# Altium PCB ui_main.PcbDoc (part 3 of 3)
Units mil, origin at the board's own origin, x right, y up, seen from the top; angles counter-clockwise.
Board outline 7342.57 x 2614.56 mil, 2 copper layers (Top Layer, Bottom Layer); 207 components, 158 nets, 707 pads, 687 vias.
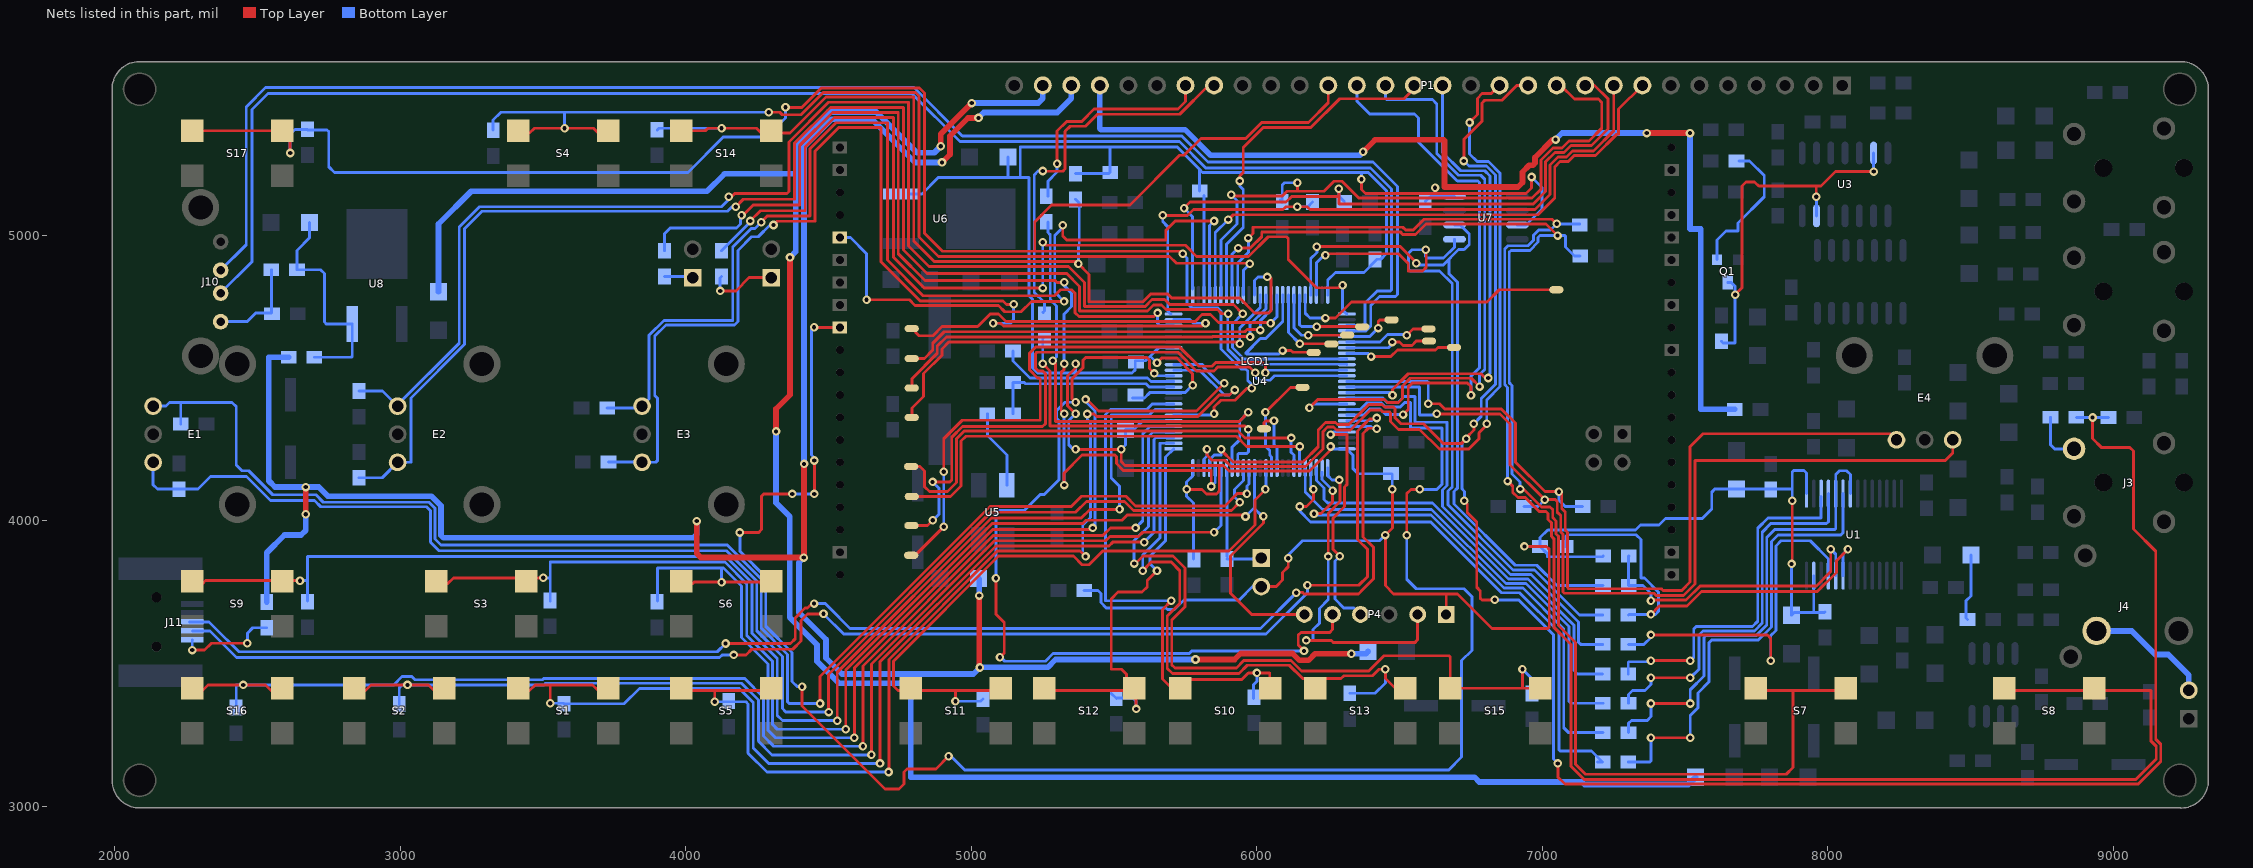
[diagram p2: the nets of this part, all layers, seen from the top]

## Via types
v1: diameter 30, hole 15, Top Layer to Bottom Layer, 687 vias

## Nets (pads, with @x,y where several pads share a name; then routed paths per layer and width w, separated by ;. In a path a pad name is that pad's centre, name@x,y a point inside that pad or via, vN(x,y) a via of type N, cw(c..) or ccw(c..) an arc to the next point about the centre after c; other vN are vias at no path point) (continued)
NetC98a_1: C98a.1 R43a.2 RFC4.1 U8.3 | length 801.8
  Bottom Layer w10: C98a.1@2682.14,5044.22 2682.14,4991.14 2638.14,4947.14 RFC4.1@2638.14,4879.22 2720.78,4879.22 2734,4866 2734,4696 2740.47,4689.53 U8.3@2831.39,4689.53 2831.39,4576.39 2827.78,4572.78 R43a.2@2698.86,4572.78
NetJ3_R: J3.R R1a.1 | length 184.9
  Bottom Layer w10: R1a.1@8779.86,4362.78 8779.86,4266.14 8794.03,4251.97 J3.R@8862.2,4251.97
NetJ4_B: J4.B P7.2 | length 440.1
  Bottom Layer w20: J4.B@8940.94,3614.17 9064.18,3614.17 9146.75,3531.61 9191.92,3531.61 9263.89,3459.64 P7.2@9263.89,3406.54
NetJ11_1: J11.1 R43b.2 | length 349.7
  Top Layer w10: v1(2271,3547) 2314,3547 2338,3571 v1(2464,3571)
  Bottom Layer w10: v1(2271,3547) 2271,3581.87 J11.1@2271.81,3582.68 ; v1(2464,3571) 2464,3606 2483.14,3625.14 R43b.2@2531.78,3625.14
NetLD1_1: LD1.1 R36.1 | length 100.2
  Bottom Layer w10: R36.1@3925.22,4855.86 4019.34,4855.86 LD1.1@4023.62,4851.57
NetLD2_1: LD2.1 R37.1 | length 253.6
  Top Layer w10: v1@4120,4800 4125,4805 4175,4805 4221.57,4851.57 LD2.1@4299.21,4851.57
  Bottom Layer w10: v1(4120,4805) 4120,4850.63 R37.1@4125.22,4855.86
NetP1_23: P1.23 R47.2 | length 1337.8
  Top Layer w10: v1(5250,5225) 5251,5224 5320,5224 5328,5232 5328,5364 5346,5382 5400,5382 5442,5424 5730,5424 5831,5525 P1.23@5850,5525
  Bottom Layer w10: v1(5250,5225) 5233.75,5225 5220,5211.25 5220,4800 5256,4764 5256,4734.63 R47.2@5250.22,4728.86
NetP1_24: P1.24 R48.2 | length 790.8
  Top Layer w10: v1(5300,5250) 5300,5364.63 5334,5398.63 5386.63,5398.63 5430,5442 5724,5442 5750,5468 P1.24@5750,5525
  Bottom Layer w10: R48.2@5268.22,5136.86 5268.22,5189.22 5300,5221 v1(5300,5250)
NetP6_1: P6.1 R40.2 U4.94 | length 432
  Bottom Layer w10: U4.94@5893.59,4184.85 5895.22,4183.22 R40.2@5895.22,3875 ; R40.2@5895.22,3865.86 6011.36,3865.86 P6.1@6015.11,3869.61
NetQ1_1: Q1.1 R13.1 | length 496.8
  Bottom Layer w10: Q1.1@7611.39,4914.66 7611.39,4983.39 7643,5015 7685.39,5015 7685.39,5043.39 7777,5135 7777,5209 7725.78,5260.22 R13.1@7689.14,5260.22
NetQ1_3: Q1.3 R15.1 U3.6 U3.13 | length 1335.5
  Top Layer w10: v1(7675,4792) 7699,4816 7699,5173 7713,5187 7743,5187 7758,5172 7959,5172 ; v1(7959,5135) 7959,5172 ; v1(8161,5223) 8027,5223 7976,5172 7959,5172
  Bottom Layer w10: R15.1@7627.22,4628.86 7633.08,4623 7675,4623 v1(7675,4792) 7675,4821.27 7661.61,4834.66 Q1.3@7649.39,4834.66 ; v1(7959,5135) 7960,5134 U3.13@7960,5068 ; U3.6@8160,5288 8160,5224 v1(8161,5223)
NetR6_2: R6.2 R21.1 U1.24 | length 1068.2
  Top Layer w10: v1(7380,3720) 7382,3722 7503,3722 7553,3772 7960,3772 8010,3822 v1(8010,3900)
  Bottom Layer w10: R6.2@7302.86,3876.78 7302.14,3876.07 R21.1@7302.14,3773.22 7351.78,3773.22 7380,3745 v1(7380,3720) ; v1(8010,3900) 8027.36,3882.64 U1.24@8027.36,3807.6
NetR7_2: R7.2 R22.1 U1.23 | length 1610.2
  Top Layer w10: v1(7380,3672) 7409,3701 7506,3701 7557,3752 7962.63,3752 8030,3819.37 8030,3860 v1(8070,3900)
  Bottom Layer w10: R7.2@7081.86,3909.78 7081.86,3944.86 7088,3951 7328,3951 7345,3934 7345,3800 7346,3799 7357.63,3799 7407,3749.63 7407,3683 7396,3672 v1(7380,3672) 7302.92,3672 R22.1@7301.14,3670.22 ; U1.23@8052.95,3807.6 8052.95,3882.95 v1(8070,3900)
NetR16_2: R16.2 U1.3 | length 1249
  Top Layer w10: v1(7380,3510) v1(7518,3510)
  Bottom Layer w10: R16.2@7300.86,3463.78 7300.86,3503.86 7303,3506 7376,3506 v1(7380,3510) ; v1(7518,3510) 7530,3522 7530,3621 7539,3630 7736,3630 7754,3648 7754,3974 7790,4010 7976.18,4010 U1.3@7976.18,4085
NetR17_2: R17.2 U1.4 | length 1350.2
  Top Layer w10: v1(7380,3450) v1(7518,3450)
  Bottom Layer w10: R17.2@7301.86,3360.78 7301.86,3391.86 7316,3406 7359,3406 7380,3427 v1(7380,3450) ; v1(7518,3450) 7548,3480 7548,3600 7562,3614 7742.63,3614 7770,3641.37 7770,3960 7800,3990 7995,3990 8001.77,3996.77 U1.4@8001.77,4095
NetR18_2: R18.2 U1.5 U1.7 | length 1672.9
  Top Layer w10: v1(7380,3360) v1(7518,3360)
  Bottom Layer w10: R18.2@7301.86,3257.78 7301.86,3290.86 7312,3301 7367,3301 7380,3314 v1(7380,3360) ; v1(7518,3360) 7518,3408 7566,3456 7566,3591 7573,3598 7749.25,3598 7786,3634.75 7786,3941 7815,3970 8025,3970 8027.36,3972.36 U1.5@8027.36,4095 8027.36,4162.36 8040,4175 8065,4175 8078.54,4161.46 U1.7@8078.54,4095
NetR19_2: R19.2 U1.6 | length 1600.8
  Top Layer w10: v1(7380,3240) v1(7518,3240)
  Bottom Layer w10: R19.2@7300.86,3154.78 7375.78,3154.78 7380,3159 v1(7380,3240) ; v1(7518,3240) 7518,3318 7545.29,3345.29 7545.29,3397.29 7584,3436 7584,3573 7593,3582 7755.88,3582 7802,3628.12 7802,3927 7825,3950 8045,3950 8052.95,3957.95 U1.6@8052.95,4095
NetR20_1: R20.1 U1.25 | length 1286.4
  Top Layer w10: v1(7380,3600) 7788,3600 7800,3588 v1(7800,3510)
  Bottom Layer w10: R20.1@7301.14,3567.22 7356.22,3567.22 7380,3591 v1(7380,3600) ; v1(7800,3510) 7800,3598 7818,3616 7818,3912 7836,3930 7938,3930 8001.77,3866.23 U1.25@8001.77,3807.6
NetR42_2: R42.2 U4.13 | length 627.8
  Bottom Layer w10: R42.2@5145.86,4594.78 5145.86,4559.14 5205,4500 5617,4500 5629,4488 U4.13@5708.55,4488
NetR43_2: R43.2 R44.2 U4.12 | length 679.5
  Bottom Layer w10: R44.2@5145.86,4374.78 R43.2@5145.86,4484.78 5185,4484.78 5189.78,4480 5611,4480 5622.68,4468.32 U4.12@5708.55,4468.32
NetR44_1: R44.1 U5.3 | length 278.6
  Bottom Layer w10: R44.1@5055.86,4374.78 5055.86,4299.14 5124.21,4230.79 U5.3@5124.21,4124.49
NRST: P4.5 U4.14 | length 2982.2
  Top Layer w10: v1(5086,3799) 5086,3672.37 5115,3643.37 5115,3537 v1(5100,3522) ; v1(5365,4415) 5353,4427 5353,4497.98 5391,4535.98 5391,4562.2 5400.8,4572 5615,4572 5624,4563 5624,4533 5640,4517 v1(5640,4516) ; v1@6172.77,3544 v1(6165,3544) 6165,3545 6145,3565 6145,3600 6154,3609 6255,3609 6264.57,3618.57 P4.5@6264.57,3672
  Bottom Layer w10: v1@5085.65,3807 5085.65,4027.65 5095,4037 5186,4037 5241,4092 5255.23,4092 5306.62,4143.38 5306.62,4350.38 5299,4358 5299,4385.77 5328.23,4415 v1(5365,4415) ; v1(5100,3522) 5103,3522 5117,3508 5259.3,3508 5286.3,3535 5763,3535 5772,3544 v1(6165,3544) v1@6166,3544 ; v1(5640,4516) 5648.31,4507.69 U4.14@5708.55,4507.69
PA0: C71.1 E3.A U4.23 | length 3482.8
  Top Layer w10: v1(4264,5046) 4285,5067 4435,5067 4435,5303 4526,5394 4706,5394 4706,4913 4831,4788 5291,4788 5312,4809 5351,4809 5363,4797 5363,4728.37 5376.37,4715 5639,4715 v1(5652,4728)
  Bottom Layer w10: C71.1@3724.14,4395.22 3840.1,4395.22 E3.A@3846.46,4401.57 3871,4426.12 3871,4649.63 3923.37,4702 4164,4702 4164,4959 4229,5024 4242,5024 v1(4264,5046) ; v1(5652,4728) 5652,4692 5659.15,4684.85 U4.23@5708.55,4684.85
PA1: C72.1 E3.B U4.24 | length 3997.5
  Top Layer w10: v1(4307,5036) 4320,5049 4452,5049 4452,5294 4536,5378 4684,5378 4684,4907 4821,4770 5110.51,4770 5122.51,4758 v1(5148,4758) ; v1(5076,4692) 5102,4692 5112,4682 5810,4682 v1(5820,4692)
  Bottom Layer w10: C72.1@3729.14,4205.22 3845.96,4205.22 E3.B@3846.46,4204.72 3894.72,4204.72 3900,4210 3900,4430 3891,4439 3891,4647 3930,4686 4170.63,4686 4182,4697.37 4182,4947 4230,4995 4253.3,4995 4294.3,5036 v1(4307,5036) ; v1@5075,4693 v1(5076,4692) 5136,4692 5148,4704 v1(5148,4758) ; U4.24@5708.55,4704.54 5765.46,4704.54 5778,4692 v1(5820,4692)
PA2: C1c.1 P1.9 U4.25 | length 2349.1
  Top Layer w10: v1(5670,5070) 5671,5069 5757,5069 5778,5090 6092,5090 6102,5100 v1(6141,5100) 6176,5100 6186,5090 6974,5090 7027,5143 7027,5246 7055,5274 7084,5274 7105,5295 7179,5295 7250,5366 P1.9@7250,5525
  Bottom Layer w10: v1(5670,5070) 5670,5047.93 5688,5029.93 5688,4734.77 U4.25@5698.55,4724.22 ; v1(6141,5100) 6178.63,5100 C1c.1@6194.78,5116.14
PA3: C1b.1 P1.10 U4.26 | length 2277.8
  Top Layer w10: v1(5745,5095) 5766,5116 6102,5116 6122,5136 6286,5136 6287,5135 ; v1(6287,5163) 6287,5135 ; P1.10@7150,5525 7183,5525 7230,5478 7230,5372 7172,5314 7099.63,5314 7075.63,5290 7043.63,5290 7011,5257.37 7011,5153 6968,5110 6288,5110 6287,5111 6287,5135
  Bottom Layer w10: v1(5745,5095) 5775,5065 U4.26@5775,4811.63 ; v1(6287,5163) 6287,5137.63 C1b.1@6305.86,5118.78
PA4: LCD1.36 U4.29 | length 2181.2
  Top Layer w10: v1(4633,4774) 4783,4774 4803,4754 5095,4754 5117,4732 5174,4732 5210.3,4768.3 v1(5324.71,4768.3) ; v1(5320,5035) 5320,4997 5334,4983 5681,4983 5681,5017 5714,5050 v1(5850,5050)
  Bottom Layer w10: LCD1.36@4539.37,4992.13 4576.22,4992.13 4633,4935.35 v1(4633,4774) ; v1(5320,5035) 5320,5027 5292,4999 5292,4801 v1(5324.71,4768.3) ; U4.29@5834.54,4791.15 5834.54,5034.54 v1(5850,5050)
PA5: P1.8 U4.30 | length 2043.1
  Top Layer w10: v1(5900,5055) 5917,5072 6985,5072 7043,5130 7043,5239.37 7061.63,5258 7090.63,5258 7111.63,5279 7185.63,5279 7260.63,5354 7267,5354 7267,5442 P1.8@7350,5525
  Bottom Layer w10: U4.30@5854.22,4791.15 5854.22,5009.22 v1(5900,5055)
PA6: C1a.1 P1.11 U4.31 | length 2318
  Top Layer w10: v1(5910,5142) 5914,5138 6089,5138 6105,5154 6142,5154 ; v1(6142,5184) 6142,5154 ; P1.11@7050,5525 7064,5525 7112,5477 7196,5477 7208,5465 7208,5375 7163,5330 7093,5330 7069,5306 7037,5306 6995,5264 6995,5161.23 6963.77,5130 6356.77,5130 6297.77,5189 6270,5189 6235,5154 6142,5154
  Bottom Layer w10: U4.31@5873.91,4791.15 5873.91,4983.91 5930,5040 5930,5122 v1(5910,5142) ; C1a.1@6082,5122.92 C1a.1@6088.78,5116.14 6088.78,5175.78 6097,5184 v1(6142,5184)
PA7: P1.16 U4.32 | length 1245.3
  Top Layer w10: v1(5940,5190) 5940,5208 5952,5220 5952,5307 6023,5378 6190,5378 6290,5478 6515,5478 6550,5513 P1.16@6550,5525
  Bottom Layer w10: U4.32@5893.59,4791.15 5893.59,4968.59 5952,5027 5952,5160 5940,5172 v1(5940,5190)
PA8: P1.17 U4.67 | length 2167.8
  Top Layer w10: v1(6184,4396) 6213,4425 6447,4425 6458,4414 6496,4414 6510,4428 6510,4471.75 6537.25,4499 6751,4499 v1(6780,4470)
  Bottom Layer w10: v1(6184,4396) 6197.26,4409.26 U4.67@6314.85,4409.26 ; P1.17@6450,5525 6450,5480 6455,5475 6615,5475 6630,5460 6630,5286 6706,5210 6784,5210 6798,5196 6798,4530 6780,4512 v1(6780,4470)
PA9: LCD1.32 U4.68 | length 6225.5
  Top Layer w10: v1(4189,3959) 4255,3959 4265,3969 4265,4086 4273,4094 v1(4373,4094) ; v1(4407,3419) 4407,3351 4697,3061 4747,3061 4764,3078 4764,3120.11 4774.89,3131 4876,3131 v1(4920,3175) ; v1(4449,4678) 4449.83,4677.17 LCD1.32@4539.37,4677.17 ; v1(4450,4094) v1(4450,4211) ; v1(6525,3949) 6525,4095 6540,4110 v1(6570,4110)
  Bottom Layer w10: v1(4189,3959) 4189,3893.37 4280,3802.37 4280,3630.63 4372,3538.63 4372,3437 4390,3419 v1(4407,3419) ; v1(4373,4094) v1(4450,4094) ; v1(4449,4678) 4440,4669 4440,4230 4450,4220 v1(4450,4211) ; v1(4920,3175) 4929,3175 4977,3127 6672,3127 6717,3172 6717,3510 6753,3546 6753,3734 6725,3762 6558,3762 6525,3795 v1(6525,3949) ; U4.68@6314.85,4389.58 6361.58,4389.58 6385.19,4413.19 6434.81,4413.19 6450,4398 6502,4398 6518,4414 6538,4414 6538,4325 6648,4325 6648,4128 6630,4110 v1(6570,4110)
PA10: P1.18 U4.69 | length 1989.4
  Top Layer w10: v1(6512,4372) 6530,4390 6530,4469.12 6543.88,4483 6737,4483 6750,4470 v1(6750,4440)
  Bottom Layer w10: U4.69@6314.85,4369.89 6373.89,4369.89 6395.37,4391.37 6431.63,4391.37 6451,4372 v1(6512,4372) ; P1.18@6350,5525 6350,5470 6395.14,5424.86 6552,5424.86 6566.22,5410.63 6566.22,5325.78 6702,5190 6774,5190 6780,5184 6780,4536 6750,4506 v1(6750,4440)
PA13: P4.4 U4.72 | length 843.2
  Top Layer w10: v1(6258,4302) 6315,4302 6315,4126.23 6307,4118.23 6307,4050 6266,4009 6266,3900 v1(6290,3876)
  Bottom Layer w10: v1(6258,4302) 6266.84,4310.84 U4.72@6314.85,4310.84 ; v1(6290,3876) 6273,3859 6273,3726 6304,3695 6340,3695 P4.4@6363,3672
PA14: P4.2 U4.76 | length 1185.4
  Top Layer w10: v1(6173,3581) 6261,3581 6269,3573 6553,3573 6563,3583 P4.2@6563,3672 ; v1(6250,3875) 6250,4026 6291,4067 6291,4140 v1(6288,4143)
  Bottom Layer w10: v1(6173,3581) 6196,3581 6197,3582 6197,3619 6219,3641 6219,3693 6250,3724 v1(6250,3875) ; U4.76@6247.92,4184.85 6247.92,4157.59 6262.51,4143 v1(6288,4143)
PA15: R18.1 U4.77 | length 1734.1
  Top Layer w10: v1(6200,4025) 6225,4025 6265,4065 v1(6265,4105)
  Bottom Layer w10: v1(6200,4025) 6205,4020 6609.37,4020 6865.37,3764 6932,3764 7075,3621 7075,3275 7092.22,3257.78 R18.1@7211.86,3257.78 ; U4.77@6228.24,4170 6228.24,4144.39 6265,4107.63 v1(6265,4105)
PB0: C53.2 S4.2 U4.35 | length 3697.7
  Top Layer w10: 3452.76,5358.27 3469.49,5375 v1(3575,5375) 3676.18,5375 S4.2@3692.91,5358.27 ; v1(4290,5431) 4328.65,5431 4337.65,5422 4403.37,5422 4481.37,5500 4804.63,5500 4817,5487.63 4817,4994 4885,4926 5694,4926 5718,4902 5973,4902 v1(5975,4900)
  Bottom Layer w10: C53.2@3324.78,5369.14 3324.78,5403.22 3352.56,5431 3575,5431 ; v1(3575,5375) 3575,5431 ; v1(4290,5431) 3575,5431 ; U4.35@5952.65,4791.15 5952.65,4877.65 v1(5975,4900)
PB2: C63.2 R38.2 S14.2 U4.37 | length 3502.6
  Top Layer w10: S14.2@3984.25,5366.14 4068.14,5366.14 4077,5375 v1(4125,5375) 4247.05,5375 4263.78,5358.27 4365.27,5358.27 4491,5484 4798,5484 4798,4980 4870,4908 5367,4908 v1(5375,4900) 5412,4863 5412,4767 5601,4767 5628,4794 5688,4794 5702,4780 5940,4780 5992,4728 6042,4728 6050,4736 v1@6050,4850
  Bottom Layer w10: C63.2@3899.78,5369.14 3905.63,5375 v1(4125,5375) ; R38.2@5365.22,5125.86 5378,5113.08 5378,4968 5375,4965 v1(5375,4900) ; U4.37@5992.02,4791.15 5992.02,4842.02 6004,4854 v1@6046,4854
  other v1: 6036,4854
PB3: C52.2 P4.6 S3.2 U4.89 | length 4682.3
  Top Layer w10: S3.2@3165.35,3779.53 3185.83,3800 v1(3500,3800) ; v1(4560,3270) 4560,3476.76 5073.24,3990 5390,3990 5402,4002 5528,4002 5546,4020 5955,4020 v1(5960,4015) ; v1(6023,4016) 6023,3992 5908,3877 5908,3746 5982,3672 P4.6@6166.15,3672
  Bottom Layer w10: v1(3500,3800) 3525,3800 ; C52.2@3525,3719.14 3525,3800 ; v1(4560,3270) 4320,3270 4304,3286 4304,3507 4213,3598 4213,3778.86 4136.86,3855 3525,3855 3525,3800 ; v1(5960,4015) 5990,4045 6019,4016 v1(6023,4016) ; 5992.02,4047.02 U4.89@5992.02,4184.85
PB4: C67.1 E1.A U4.90 | length 5210.6
  Top Layer w10: v1(4470,3360) 4470,3454.65 5065.35,4050 5350,4050 5386,4086 5541,4086 5575,4052 5888,4052 5931,4095 v1(5965,4095)
  Bottom Layer w10: E1.A@2133.86,4401.57 2178.57,4401.57 2191.14,4414.14 2230,4414.14 ; C67.1@2230.63,4338.92 2230.63,4413.51 2230,4414.14 ; v1(4470,3360) 4362,3360 4356,3366 4356,3532 4264,3624 4264,3795.75 4144.75,3915 3142,3915 3121,3936 3121,4044 3100,4065 2730,4065 2704,4091 2553,4091 2469,4175 2445,4175 2425,4195 2425,4400 2410.86,4414.14 2230,4414.14 ; v1(5965,4095) 5965,4122 5972.33,4129.33 U4.90@5972.33,4184.85
PB5: C68.1 E1.B U4.91 | length 5073
  Top Layer w10: v1(4500,3330) 4500,3462.02 5067.98,4030 5365,4030 5403,4068 5536.37,4068 5568.37,4036 5911,4036 v1(5940,4065)
  Bottom Layer w10: E1.B@2133.86,4204.72 2133.86,4126.14 2149.14,4110.86 C68.1@2225.22,4110.86 2290.86,4110.86 2335,4155 2461,4155 2545,4071 2699,4071 2721,4049 3091,4049 3105,4035 3105,3925 3135,3895 4142.12,3895 4248,3789.12 4248,3615 4338,3525 4338,3342 4350,3330 v1(4500,3330) ; v1(5940,4065) 5922,4083 5922,4110 5952.65,4140.65 U4.91@5952.65,4184.85
PB6: R47.1 U4.92 | length 1169.1
  Top Layer w10: v1(5250,4550) 5275,4525 5275,4332 5958,4332 v1(5970,4320)
  Bottom Layer w10: v1(5250,4550) 5250,4638.63 R47.1@5250.22,4638.86 ; U4.92@5932.96,4200 5932.96,4232.04 5935.92,4235 5964,4235 5970,4241 v1(5970,4320)
PB7: R48.1 U4.93 | length 1627.6
  Top Layer w10: v1(5285,4560) 5295,4550 5295,4348 5938,4348 v1(5970,4380)
  Bottom Layer w10: R48.1@5268.22,5046.86 5268.22,5009.78 5276,5002 5276,4774 5298,4752 5298,4573 v1(5285,4560) ; U4.93@5913.28,4184.85 5913.28,4257.28 5940,4284 5940,4350 v1(5970,4380)
PB8: C51.2 S2.2 U4.95 | length 4107
  Top Layer w10: 2877.95,3405.51 2897.44,3425 v1(3025,3425) 3098.62,3425 S2.2@3118.11,3405.51 ; v1(4650,3180) 4650,3498.88 5081.12,3930 5470,3930 5485,3945 5585,3945 5600,3960 v1(5850,3960)
  Bottom Layer w10: C51.2@2996.22,3357.86 2996.22,3415.22 3006,3425 v1(3025,3425) 3503,3425 3509,3431 4195,3431 4254,3372 4254,3228 4302,3180 v1(4650,3180) ; v1(5850,3960) 5873.99,3983.99 5873.99,4002 U4.95@5873.91,4184.85
PB9: R36.2 U4.96 | length 3786.1
  Top Layer w10: v1@4200,5070 4236,5106 4399,5106 4399,5315 4514,5430 4744,5430 4744,4935 4838,4841 5294,4841 5300,4835 v1(5325,4835) ; v1(5325,4125) 5325,4167 5388,4230 5502,4230 5508,4224 5508,4200 5532,4176 5840,4176 v1(5840,4120) ; v1(5325,4375) 5315,4385 5315,4520 5325,4530 v1(5325,4550)
  Bottom Layer w10: R36.2@3925.22,4945.86 3925.22,5005.22 3945,5025 4176.74,5025 4191.74,5040 v1@4191.74,5066.74 ; v1(5325,4125) v1(5325,4375) ; v1(5325,4550) 5325,4724 5351,4750 5351,4797 5325,4823 v1(5325,4835) ; v1(5840,4120) 5854.22,4134.22 U4.96@5854.22,4184.85
  other v1: 4195,5070
PB10: R21.2 U4.47 U7.6 | length 2385
  Top Layer w10: v1(6210,4960) 6503,4960 6558,4905 v1(6558,4902)
  Bottom Layer w10: U4.47@6188.87,4791.15 6188.87,4918.87 6210,4940 v1(6210,4960) ; v1@6558,4900 6562,4896 6652.63,4896 6706.63,4950 6726,4950 6744,4968 6744,5004 6712,5036 U7.6@6692,5036 ; 6673,4916.37 6673,4865 6702,4836 6702,4114.12 6690,4102.12 6690,4059 6905,3844 6980,3844 7050.78,3773.22 R21.2@7212.14,3773.22
PB11: R22.2 U4.48 U7.5 | length 2559.6
  Top Layer w10: v1(6240,4930) 6240,4935 6496,4935 6530,4901 6530,4875 6580,4875 6593,4888 6593,4947 v1(6591,4949)
  Bottom Layer w10: U4.48@6208.55,4791.15 6208.55,4903.55 v1@6232.5,4927.5 ; U7.5@6692,4986 6692,4958 6654,4920 6597,4920 6591,4926 v1(6591,4949) 6543,4949 6531,4937 6531,4881 6537,4875 6640,4875 6684,4831 6684,4118.75 6669,4103.75 6669,4056 6897,3828 6972,3828 7129.78,3670.22 R22.2@7211.14,3670.22
PB12: R37.2 U4.51 | length 3467
  Top Layer w10: v1(4225,5050) 4261,5086 4418,5086 4418,5309 4521,5412 4727,5412 4727,4923 4835,4815 v1(5250,4815) ; v1(5250,4975) 5260,4965 5750,4965 5789,4926 5970.63,4926 6039.63,4995 6104,4995 6110,4989 6110,4915 6143,4882 6143.25,4882 6209.25,4816 6286.15,4816 v1@6295.15,4825
  Bottom Layer w10: R37.2@4125.22,4945.86 4225,5045.63 v1(4225,5050) ; v1(5250,4815) v1(5250,4975) ; v1(6300,4825) 6300,4739.07 U4.51@6314.85,4724.22
PC0: C54.2 S5.2 U4.15 | length 3684
  Top Layer w10: S5.2@4011.81,3405.51 4102,3405.51 ; v1(4101,3366) 4101,3404.51 4102,3405.51 ; S5.2@4271.65,3405.51 4102,3405.51 ; v1(4710,3120) 4711,3121 4711,3514.63 5090.37,3894 5381,3894 v1@5390,3885 ; v1(5406,4374) 5430,4374 5439,4365 5793,4365 5868,4440 5904,4440 v1(5922,4458)
  Bottom Layer w10: v1(4101,3366) 4210,3366 4218,3358 4218,3186 4284,3120 v1(4710,3120) ; v1(5400,3875) 5390,3885 5390,3985 5417,4012 5417,4343 5406,4354 5406,4369 v1@5400,4375 ; U4.15@5708.55,4527.37 5798.63,4527.37 5886,4440 5904,4440 v1(5922,4458)
PC1: C55.2 S6.2 U4.16 | length 4089
  Top Layer w10: 4023.62,3779.53 4029.09,3785 v1(4125,3785) 4258.31,3785 S6.2@4263.78,3779.53 ; v1(4590,3240) 4590,3484.14 5075.86,3970 5420,3970 v1(5425,3975) ; v1(5400,4425) 5405,4425 5445,4385 5789,4385 v1(5886,4482)
  Bottom Layer w10: C55.2@3900,3719.14 3900,3835 4125,3835 ; v1(4125,3785) 4125,3835 ; v1(4590,3240) 4314,3240 4288,3266 4288,3498 4195,3591 4195,3772 4132,3835 4125,3835 ; v1(5400,4425) 5400,4418 5433,4385 5433,3983 v1(5425,3975) ; U4.16@5708.55,4547.06 5808.94,4547.06 5812,4544 5812,4538 5868,4482 v1(5886,4482)
PC4: C56.2 S7.2 U4.33 | length 4910.5
  Top Layer w10: v1(5935,4955) 5977,4955 6017,4995 6017,5010 6019,5012 6502,5012 6511,5003 6556,5003 6592,5039 7013,5039 v1(7053,4999) ; v1(6922,4111) 6934.23,4111 6997.23,4048 7027,4048 7036,4039 7036,4011.37 7048,3999.37 7048,3954 7056,3946 7056,3633.63 7116,3573.63 7116,3147 7151,3112 7854,3112 7878,3136 7878,3405.51 ; 7787.4,3405.51 7878,3405.51 ; S7.2@8035.43,3405.51 7878,3405.51
  Bottom Layer w10: U4.33@5913.28,4791.15 5913.28,4933.28 v1(5935,4955) ; v1(6922,4111) 6922,4136 6894,4164 6894,4473.63 6884,4483.63 6884,4941 6890,4947 6956.15,4947 6985,4975.85 6985,4992 6992,4999 v1(7053,4999) 7078.49,4999 7081,4996.49 7081,4959 7112.78,4927.22 C56.2@7132.14,4927.22
PC5: C57.2 S8.2 U4.34 | length 6420.8
  Top Layer w10: v1(5970,4990) 5986.5,5006.5 5986.5,5028.08 6510.92,5028.08 6520,5019 6548,5019 6585,5056 7034,5056 v1(7050,5040) ; v1(6878,4139) 6896,4121 6896,4099 6914,4081 6940,4081 6989,4032 7013,4032 7020,4025 7020,4004.75 7031.5,3993.25 7031.5,3945.5 7040,3937 7040,3627 7100,3567 7100,3140.37 7146.37,3094 9078,3094 9150,3166 9150,3210.37 9131,3229.37 9131,3405.51 S8.2@8905.51,3405.51 ; S8.2@8645.67,3405.51 8645.67,3404.14 8656.11,3404.14 8657.48,3405.51 S8.2@8897.64,3405.51
  Bottom Layer w10: U4.34@5932.96,4791.15 5932.96,4902.96 5970,4940 v1(5970,4990) ; v1(6878,4139) 6878,4467 6868,4477 6868,4952 6879,4963 6949.53,4963 6969,4982.47 6969,5000 6987,5018 7028,5018 v1(7050,5040) C57.2@7131,5040
PC6: C73.1 E4.A U4.63 | length 3172.1
  Top Layer w10: v1@6600,4400 6610,4410 6640,4410 6658,4392 6856,4392 6906,4342 6906,4205 7009,4102 v1(7058,4102) 7068,4092 7068,4043 7080,4031 7080,3967.25 7088,3959.25 7088,3766 7092,3762 7416,3762 7422,3756 7488,3756 7517,3785 7517,4259 7563,4305 8218.62,4305 E4.A@8240.16,4283.46
  Bottom Layer w10: U4.63@6314.85,4488 6597,4488 6600,4485 v1(6600,4410) ; v1(7058,4102) 7058,4072 7080.22,4049.78 C73.1@7140.86,4049.78
PC7: C74.1 E4.B U4.64 | length 3332.7
  Top Layer w10: v1(6630,4375) 6631,4374 6851.37,4374 6887,4338.37 6887,4195 v1(7008,4074) 7045,4074 7052,4067 7052,4030 7064,4018 7064,3960.63 7072,3952.63 7072,3751 7077,3746 7390.77,3746 7398.77,3738 7494,3738 7535,3779 7535,4211 8411,4211 8437.01,4237.01 E4.B@8437.01,4283.46
  Bottom Layer w10: U4.64@6314.85,4468.32 6570,4468.32 6570,4370 6625,4370 v1(6630,4375) ; C74.1@6935.14,4050.22 6984.22,4050.22 v1(7008,4074)
PC8: P1.15 U4.65 | length 1687.4
  Top Layer w10: v1(6475,4440) 6475,4460.12 6529.88,4515 6785,4515 v1@6800,4500
  Bottom Layer w10: U4.65@6314.85,4448.63 6466.37,4448.63 v1(6475,4440) ; P1.15@6650,5525 6650,5290 6714,5226 6798,5226 6816,5208 6816,4516 v1@6800,4500
  other v1: 6810,4500
PC9: R20.2 U4.66 | length 1560.3
  Bottom Layer w10: U4.66@6314.85,4428.95 6315.9,4430 6440.63,4430 6456.63,4414 6494,4414 6515,4435 6554,4435 6554,4346 6555,4345 6666,4345 6666,4123.37 6650,4107.37 6650,4050 6888,3812 6960,3812 7127,3645 7127,3574.63 7134.41,3567.22 R20.2@7211.14,3567.22
PC10: R16.1 U4.78 | length 1442.4
  Bottom Layer w10: U4.78@6208.55,4184.85 6208.55,4141.45 6235,4115 6235,4075 6248,4062 6615,4062 6881,3796 6949,3796 7111,3634 7111,3476 7123.22,3463.78 R16.1@7210.86,3463.78
PC11: R19.1 U4.79 | length 1865
  Top Layer w10: v1(6150,4050) 6174,4050 6198,4074 v1@6198,4115 ; v1@6198,4113 v1@6200,4115
  Bottom Layer w10: v1@6150,4049 6150,4034 6188,3996 6609,3996 6857,3748 6920,3748 7058,3610 7058,3198 7062,3194 7171.63,3194 R19.1@7210.86,3154.78 R19.1@7192.78,3154.78 ; v1@6188.87,4121.13 U4.79@6188.87,4184.85
  other v1: 6198,4110
PC12: R17.1 U4.80 | length 1586.4
  Bottom Layer w10: U4.80@6169.18,4184.85 6169.18,4100.82 6230,4040 6612,4040 6872,3780 6942.37,3780 7093,3629.37 7093,3368 7100.22,3360.78 R17.1@7211.86,3360.78
PC13: C66.2 P1.19 S17.2 U4.7 | length 6769.3
  Top Layer w10: S17.2@2271.65,5366.14 S17.2@2586.61,5366.14 ; S17.2@2559.06,5358.27 2608.73,5358.27 2614,5353 v1(2614,5288) ; v1(4349,5448) 4406,5448 4474,5516 4818,5516 4836,5498 4836,5007 4899,4944 5731,4944 v1(5740,4935) ; 5222,4944 5222,5047 5281,5106 5555,5106 5729,5280 5745,5280 5804,5339 5961,5339 6017,5395 6181,5395 6250,5464 P1.19@6250,5525 ; v1(5850,4375) 5850,4398 5874,4422 5922.77,4422 5964.77,4464 v1(5982,4464)
  Bottom Layer w10: v1(2614,5288) 2614,5354 2630.86,5370.86 C66.2@2673.07,5370.86 ; C66.2@2675.22,5370.86 C66.2@2673.07,5370.86 ; v1(4349,5448) 4349,5411 4282,5344 4131,5344 4007,5220 2769,5220 2749,5240 2749,5363 2742.86,5369.14 2674.78,5369.14 C66.2@2673.07,5370.86 ; U4.7@5708.55,4369.89 5844.89,4369.89 v1(5850,4375) ; v1(5740,4935) 5755,4920 5755,4763 5772,4746 5862,4746 5874,4734 5874,4602 5944,4532 5960,4532 5968,4524 5968,4491.8 5982,4477.8 v1(5982,4464)
PC14: C58.2 S9.2 U4.8 | length 4805.8
  Top Layer w10: S9.2@2307.09,3779.53 2317.8,3790.25 v1(2648.55,3790.25) ; v1(4530,3300) 4530,3469.39 5070.61,4010 5385,4010 5415,4040 v1(5519,4040)
  Bottom Layer w10: v1(2648.55,3790.25) 2674.75,3790.25 2675,3790 ; C58.2@2675,3719.14 2675,3790 ; v1(4530,3300) 4338,3300 4320,3318 4320,3518 4231,3607 4231,3783.49 4139.49,3875 2675,3875 2675,3790 ; v1(5519,4040) 5519,4121 5490,4150 5490,4370 5623,4370 5643,4390 5708.13,4390 U4.8@5708.55,4389.58
PC15: C59.2 S10.2 U4.9 | length 2007.3
  Top Layer w10: v1(5700,3720) 5669,3689 5669,3446 5720.94,3394.06 5762.59,3444 5947,3444 5970,3467 v1(6000,3467) 6044,3467 6044.86,3466.14 6044.86,3411 S10.2@6047.24,3413.39
  Bottom Layer w10: v1(5700,3720) 5470,3720 5470,4372.63 5487.37,4390 5614,4390 5633.26,4409.26 U4.9@5708.55,4409.26 ; C59.2@5987.78,3377.14 5987.78,3425.78 6000,3438 v1(6000,3467)
PD0: L25.1 U4.81 | length 1631.7
  Top Layer w10: L25.1@4792.08,4085 4927,4085 4964,4122 4964,4279 4981,4296 5928,4296 5964,4260 6140,4260 6150,4250 v1(6150,4260)
  Bottom Layer w10: U4.81@6149.5,4184.85 6149.5,4249.5 v1@6150,4250
PD1: L26.1 U4.82 | length 1683.5
  Top Layer w10: L26.1@4789.86,4190.22 4819.78,4190.22 4836,4174 4836,4119 4853,4102 4916,4102 4948,4134 4948,4287 4975,4314 5934,4314 5958,4290 v1@6108,4290
  Bottom Layer w10: v1(6120,4290) 6120,4240 6129.81,4230.19 U4.82@6129.81,4184.85
PD4: L14.1 U4.85 | length 230.5
  Top Layer w10: L14.1@6024.86,4322.22 6024.86,4344.14 6030.71,4350 v1(6060,4350) v1@6059,4351
  Bottom Layer w10: v1(6060,4350) 6060,4266 6070.76,4255.24 U4.85@6070.76,4184.85
PD5: L13.1 U4.86 | length 369.9
  Top Layer w10: v1(6030,4380) 6117.22,4467.22 L13.1@6159.86,4467.22
  Bottom Layer w10: v1(6030,4380) 6030,4261 6044.95,4246.05 6044.95,4230 6051.07,4223.88 U4.86@6051.07,4184.85
PD6: C60.2 S11.2 U4.87 | length 2282.6
  Top Layer w10: v1(4944,3368) 4944,3405.51 ; S11.2@5074.8,3405.51 4944,3405.51 ; v1(6030,4110) 5993,4073 5993,3984.63 5902.37,3894 5460,3894 5412,3846 5388,3846 5358,3876 5095,3876 4727,3508 4727,3421.02 4742.51,3405.51 4944,3405.51
  Bottom Layer w10: v1(4944,3368) 5032.37,3368 C60.2@5040.22,3375.86 ; v1(6030,4110) 6031.39,4111.39 U4.87@6031.39,4184.85
PD8: L8.1 U4.55 | length 193.5
  Top Layer w10: v1@6425,4676 6425,4697.91 6430.86,4703.77 L8.1@6471.78,4703.77
  Bottom Layer w10: U4.55@6314.85,4645.48 6395.48,4645.48 v1(6425,4675)
PD9: L9.1 U4.56 | length 306.8
  Top Layer w10: v1(6525,4650) 6547.04,4672.04 L9.1@6600.86,4672.04
  Bottom Layer w10: U4.56@6314.85,4625.8 6430.8,4625.8 6457,4652 6523,4652 v1(6525,4650)
PD10: L10.1 U4.57 | length 312.4
  Top Layer w10: v1(6474,4626) 6500.02,4626 6512,4614.02 6543.02,4614.02 6558.22,4629.22 L10.1@6602.86,4629.22
  Bottom Layer w10: U4.57@6314.85,4606.11 6461.11,4606.11 6475,4620 6474,4621 v1(6474,4626)
PD11: L12.1 U4.58 | length 394
  Top Layer w10: v1(6400,4575) 6469,4575 6492,4598 6625,4598 6634.22,4607.22 L12.1@6690.48,4607.22 ; L12.1@6689.63,4607 L12.1@6689.85,4606.78
  Bottom Layer w10: U4.58@6314.85,4586.43 6388.57,4586.43 v1(6400,4575)
PD12: C69.1 E2.A U4.59 | length 5121.9
  Top Layer w10: v1@4150,5125 4171,5146 4354,5146 4361,5153 4361,5327 4500,5466 4780,5466 4780,4962 4852,4890 5340,4890 5396,4834 5396,4751 5609,4751 5633,4775 5677,4775 5694.5,4757.5 5917.5,4757.5 v1(5950,4725)
  Bottom Layer w10: C69.1@2854.78,4454.14 2937.59,4454.14 E2.A@2990.16,4401.57 2990.16,4406.16 3206,4622 3206,5029 3277,5100 4125,5100 v1@4150,5125 ; v1(5950,4725) 5914,4689 5914,4607.25 5954.51,4566.74 U4.59@6314.85,4566.74
  other v1: 4150,5135
PD13: C70.1 E2.B U4.60 | length 5290.3
  Top Layer w10: v1(4175,5100) 4201,5126 4381,5126 4381,5322 4507,5448 4762,5448 4762,4948 4844,4866 5334,4866 5379,4821 5379,4735 5617,4735 5638,4756 5666,4756 5681.5,4740.5 5861.5,4740.5 5877,4725 v1(5900,4725)
  Bottom Layer w10: C70.1@2855.22,4150.86 2936.29,4150.86 E2.B@2990.16,4204.72 3036.72,4204.72 3037,4205 3037,4430.37 3225,4618.37 3225,5023 3286,5084 4145.77,5084 4161.77,5100 v1(4175,5100) ; v1(5900,4725) 5898,4723 5898,4600.63 5950.63,4548 6313.91,4548 U4.60@6314.85,4547.06
PD14: L23.1 U4.61 | length 2268.4
  Top Layer w10: L23.1@4789.86,3879.22 4803.22,3879.22 v1(4903,3979) ; v1(4903,4172) 4903,4287.25 4967.75,4352 5241,4352 5241,4496 5236.78,4500.22 5231.78,4500.22 5203,4529 5203,4586.63 5224.37,4608 5730,4608 5797,4541 5843,4541 5856,4554 6019.49,4554 6030,4543.49 v1(6030,4518)
  Bottom Layer w10: v1(4903,3979) v1(4903,4172) ; v1(6030,4518) 6039.37,4527.37 U4.61@6314.85,4527.37
PD15: L24.1 U4.62 | length 2227.5
  Top Layer w10: L24.1@4790.86,3983.44 4846.44,3983.44 v1(4865,4002) ; v1(4864,4136) 4924,4136 4931,4143 4931,4292.63 4968.37,4330 5249,4330 5259,4340 5259,4515 5250,4524 5234,4524 5224,4534 5224,4585 5229,4590 5724,4590 5789,4525 5849.63,4525 5862.63,4538 5974,4538 v1(5994,4518)
  Bottom Layer w10: v1(4864,4136) 4886,4114 4886,4023 v1(4865,4002) ; v1(5994,4518) 5994,4506 6008,4492 6046,4492 6061.69,4507.69 U4.62@6314.85,4507.69
PE0: C37.1 P1.12 R1a.2 U4.97 | length 7730
  Top Layer w10: v1(5875,4250) 5875,4247 5916,4206 6162,4206 6215,4259 6215,4319 6215.6,4319 6240.6,4344 6275.4,4344 6282.4,4337 6322,4337 6392,4407 6438,4407 6447,4398 6479,4398 6484,4393 6484,4361 6505,4340 6583,4340 6653,4270 6716,4270 v1(6733,4287) 6733,4290.63 6760,4317.63 v1(6760,4340) ; v1(6725,5260) 6725,5336 6788.39,5399.39 6788.39,5463.39 6798,5473 6858.1,5473 6910.1,5525 P1.12@6950,5525 ; v1(6726,4070) 6737,4059 6737,4029 6770,3996 6770,3767 6782.5,3754.5 6782.5,3728.5 6788,3723 v1(6833,3723) ; v1(7054,3150) 7054,3103 7079,3078 9087,3078 9166,3157 9166,3217 9148,3235 9148,3893 9070,3971 9070,4244 9058,4256 8959,4256 8926.86,4288.14 v1(8926.86,4361.78)
  Bottom Layer w10: U4.97@5834.54,4184.85 5834.54,4213.71 5850.83,4230 5875,4230 v1(5875,4250) ; v1(6725,5260) 6743,5242 6804.63,5242 6836,5210.63 6836,4478 6786,4428 6786,4366 v1(6760,4340) ; v1(6726,4070) 6727,4071 6727,4103 6718,4112 6718,4272 v1(6733,4287) ; v1(6833,3723) 6917,3723 7039,3601 7039,3165 v1(7054,3150) ; R1a.2@8870.86,4361.78 v1(8926.86,4361.78) C37.1@8982.86,4361.78
PE1: P1.13 U4.98 | length 2672.3
  Top Layer w10: v1(5825,4250) 5825,4230 5843,4212 5887.37,4212 5909.37,4190 6170,4190 6231,4251 6231,4311.77 6247.23,4328 6268.77,4328 6278.77,4318 6328,4318 6398,4388 6434.37,4388 6440.37,4382 6464,4382 6468,4378 6468,4348 6496,4320 6570,4320 6639,4251 6742,4251 6778,4287 6778,4308 6805,4335 v1(6805,4340) ; v1(6745,5395) 6745,5396 6772.39,5423.39 6772.39,5479.39 6789,5496 6821,5496 P1.13@6850,5525
  Bottom Layer w10: U4.98@5814.85,4184.85 5814.85,4216.65 5825,4226.8 v1(5825,4250) ; v1(6745,5395) 6745,5285 6772,5258 6811.25,5258 6852,5217.25 6852,4470 6805,4423 v1(6805,4340)
PE2: C61.2 S12.2 U4.1 | length 1514.6
  Top Layer w10: S12.2@5283.46,3405.51 S12.2@5543.31,3405.51 ; v1(5577,3341) 5577,3371.82 S12.2@5543.31,3405.51 ; v1(5650,3825) 5616,3791 5616,3768 5598,3750 5514,3750 5490,3726 5490,3480 5526,3480 5543.31,3462.69 S12.2@5543.31,3405.51
  Bottom Layer w10: C61.2@5490,3394.92 C61.2@5507.78,3377.14 ; C61.2@5507.22,3378.86 5566.14,3378.86 5577,3368 v1(5577,3341) ; v1(5650,3825) 5625,3850 5625,3875 5680,3930 5680,4223.23 U4.1@5708.55,4251.78
PE3: C62.2 S13.2 U4.2 | length 2130.4
  Top Layer w10: v1(5600,3825) 5630,3855 5700,3855 5730,3825 5730,3710 5686,3666 5686,3483 5704,3465 5937,3465 5966,3494 6113.37,3494 6160.37,3447 6295,3447 6305,3457 6405,3457 6428,3480 v1(6450,3480) 6450,3447.64 S13.2@6492.13,3405.51
  Bottom Layer w10: v1(5600,3825) 5600,3880 5660,3940 5660,4270 5661.47,4271.47 U4.2@5708.55,4271.47 ; C62.2@6325.22,3395.86 6413.86,3395.86 6450,3432 v1(6450,3480)
PE4: C50.2 S1.2 U4.3 | length 3601.6
  Top Layer w10: 3452.76,3405.51 3472.24,3425 3525,3425 ; v1(3525,3361) 3525,3425 ; S1.2@3692.91,3405.51 3673.43,3425 3525,3425 ; v1(4680,3150) 4680,3506.25 5085.75,3912 5482,3912 5495,3925 v1(5605,3925)
  Bottom Layer w10: v1(3525,3361) 3571.08,3361 C50.2@3573.22,3358.86 3782.86,3358.86 3837,3413 4187,3413 4236,3364 4236,3204 4290,3150 v1(4680,3150) ; v1(5605,3925) 5640,3960 5640,4285 5646.15,4291.15 U4.3@5708.55,4291.15
PE5: C64.2 S15.2 U4.4 | length 2742
  Top Layer w10: v1@5575,3850 5601,3876 5706,3876 5748,3834 5748,3699 5702,3653 5702,3495 5713,3484 5928,3484 5954,3510 6120,3510 6156,3474 6392,3474 6445,3527 6673,3527 6677.17,3522.83 S15.2@6677.17,3413.39 6932,3413.39 ; v1(6930,3480) 6930,3415.39 6932,3413.39 ; S15.2@6992.13,3413.39 6932,3413.39
  Bottom Layer w10: v1@5575,3850 5570,3855 5570,3930 5620,3980 5620,4295 5635.84,4310.84 U4.4@5708.55,4310.84 ; v1(6930,3480) 6963.22,3446.78 C64.2@6963.22,3394.86
  other v1: 5570,3850
PE6: C65.2 S16.2 U4.5 | length 4623.9
  Top Layer w10: S16.2@2307.09,3405.51 2326.57,3425 v1(2450,3425) 2527.76,3425 S16.2@2547.24,3405.51 ; v1(4620,3210) 4620,3491.51 5076.49,3948 5460,3948 5487,3975 v1(5575,3975)
  Bottom Layer w10: C65.2@2425,3344.14 2425,3425 v1(2450,3425) 2977,3425 3006,3454 3040,3454 3051,3443 3498.37,3443 3502.37,3447 4206,3447 4272,3381 4272,3246 4308,3210 v1(4620,3210) ; v1(5575,3975) 5600,4000 5600,4305 5625.52,4330.52 U4.5@5708.55,4330.52
PE7: L27.1 U4.38 | length 1531.1
  Top Layer w10: L27.1@4791.86,4362.22 4791.86,4394.67 4832.86,4435.67 4832.86,4516.04 4896.63,4579.81 4896.63,4601.63 4921,4626 v1@5934,4626
  Bottom Layer w10: v1(5940,4620) 5940,4675 6011.7,4746.7 U4.38@6011.7,4791.15
PE8: L28.1 U4.39 | length 1463.7
  Top Layer w10: L28.1@4791.86,4465.22 4791.86,4497.67 4880.63,4586.44 4880.63,4611.63 4913,4644 5844,4644 5846,4646 5974,4646 v1(5976,4644)
  Bottom Layer w10: v1(5976,4644) 5976,4687.21 6031.39,4742.6 U4.39@6031.39,4791.15
PE9: L29.1 U4.40 | length 1416.5
  Top Layer w10: L29.1@4791.86,4568.22 4835.22,4568.22 4864.63,4597.63 4864.63,4621.63 4905,4662 5957.23,4662 5965.23,4670 6010,4670 v1(6012,4668)
  Bottom Layer w10: v1(6012,4668) 6012,4700.59 6051.07,4739.66 U4.40@6051.07,4791.15
PE10: L30.1 U4.41 | length 1439.8
  Top Layer w10: L30.1@4791.86,4673.22 4817.08,4648 4865,4648 4897,4680 5022,4680 5066,4724 5095,4724 5121,4698 5784,4698 5808,4722 5838,4722 5866,4694 6046,4694 v1(6048,4692)
  Bottom Layer w10: v1(6048,4692) 6070.76,4714.76 U4.41@6070.76,4791.15
PE11: L3.1 U4.42 | length 515.3
  Top Layer w10: v1(6090,4596) 6120,4596 6126,4590 L3.1@6198.86,4590
  Bottom Layer w10: v1(6090,4596) 6078,4584 5964,4584 5961,4587 6012,4638 6030.77,4638 6090.44,4697.67 U4.42@6090.44,4791.15
PE12: L4.1 U4.43 | length 298.5
  Top Layer w10: v1(6150,4620) L4.1@6260.86,4620
  Bottom Layer w10: U4.43@6110.13,4791.15 6110.13,4659.87 v1(6150,4620)
PE13: L5.1 U4.44 | length 312.3
  Top Layer w10: v1(6180,4650) L5.1@6316.35,4650
  Bottom Layer w10: U4.44@6129.81,4791.15 6129.81,4676.19 6156,4650 v1(6180,4650)
PE14: L6.1 U4.45 | length 326.7
  Top Layer w10: v1(6210,4680) L6.1@6368.86,4680
  Bottom Layer w10: U4.45@6149.5,4791.15 6149.5,4686.5 6156,4680 v1(6210,4680)
PE15: L7.1 U4.46 | length 992
  Top Layer w10: v1(6240,4710) 6275,4710 6331,4766 6806,4766 6849,4809 L7.1@7048.86,4809
  Bottom Layer w10: U4.46@6169.18,4791.15 6169.18,4726.82 6186,4710 v1(6240,4710)
SPA: C9.2 R2.2 | length 234.8
  Bottom Layer w10: R2.2@8489.14,3654.22 8484,3659.37 8484,3720 8501,3737 8501,3879.63 C9.2@8500.86,3879.78
UI_3V3: P1.27 RFC1.2 | length 3678.8
  Top Layer w20: v1(6372,5292) 6414,5334 6654,5334 6657,5331 6657,5169 6914,5169 6930,5185 6930,5221 6954,5245 6966,5245 6974,5253 6974,5272.7 7036.3,5335 v1(7046,5335) ; v1(7365,5358) v1(7517,5358)
  Bottom Layer w20: P1.27@5450,5525 5450,5374 5454,5370 5748,5370 5838,5280 6360,5280 v1(6372,5292) ; v1(7046,5335) 7069,5358 v1(7365,5358) ; v1@7518,5358 v1(7517,5358) 7517,5023 7518,5022 7555,5022 7555,4390.22 RFC1.2@7674.14,4390.22
UI_3V_MCU: C14.2 C15.2 C16.1 C17.1 C82.1 C85.2 C86.2 C87.2 C88.2 C89.2 C90.2 C98.1 C99.1 P4.1 P6.2 R6.1 R7.1 R38.1 RFC2.1 RFC3.2 U1.1 U1.27 U4.6 U4.11 U4.19 U4.28 U4.50 U4.75 U4.100 U6.3 U7.3 U7.8 | length 13298.1
  Top Layer w10: v1(5365,4250) v1(5525,4250) 5525,4207 5538,4194 5868,4194 ; v1(5365,4375) 5337,4403 5337,4507 5365,4535 v1(5365,4550) ; v1(5650,4553) 5667,4570 5720,4570 5775,4515 v1(5775,4475) ; v1(5754,4110) 5808,4110 5824,4094 5858,4094 5868,4104 5868,4194 ; P6.2@6015.11,3769.61 6067.61,3769.61 6090,3792 6090,3819 6110,3839 v1(6110,3869) ; v1(6258,4260) 6258,4248 6184,4174 5902.75,4174 5882.75,4194 5868,4194 ; v1(6366,5196) 6366,5160 6380,5146 6625,5146 ; v1(6474,4110) 6475,4109 6475,3975 v1(6450,3950) 6450,3773 6479,3744 6663,3744 ; v1@6618,5160 v1@6618,5166 ; v1(6624,5166) 6624,5147 6625,5146 ; P4.1@6663,3672 6663,3744 ; v1(6937,3910) 7014.25,3910 7024,3900.25 7024,3628 7019,3623 6824,3623 6703,3744 6663,3744 ; v1(6962,5204) 6962,5165 6943,5146 6625,5146 ; v1(7872.78,3848.78) 7875,3851 v1(7875,4070)
  Bottom Layer w10: U6.3@4783.53,5144.61 4826.61,5144.61 4884,5202 5130,5202 ; C98.1@5128.29,5274.22 5128.29,5203.71 5130,5202 ; v1(5365,4250) 5357,4250 5341,4266 5341,4351 v1(5365,4375) ; 5365,4520 v1(5365,4550) ; R38.1@5365.22,5215.86 5481.93,5215.86 RFC2.1@5485.86,5219.78 5485.86,5309 5721,5309 5800,5230 ; RFC3.2@5394.86,3755.78 5443.22,3755.78 5454,3745 5454,3713.37 5472.37,3695 5681,3695 5687,3689 5711,3689 5745,3723 5938,3723 5984.61,3769.61 P6.2@6015.11,3769.61 ; 5485,5309.14 5171.14,5309.14 5171.14,5202.14 5171,5202 ; v1(5525,4250) 5539.78,4264.78 C82.1@5539.78,4319.14 5569.14,4319.14 5600.21,4350.21 U4.6@5708.55,4350.21 ; C90.2@5564.14,4430.22 5606.22,4430.22 5624.63,4448.63 U4.11@5708.55,4448.63 5748.63,4448.63 v1(5775,4475) ; v1(5650,4553) 5627.5,4575.5 5627.5,4577.5 ; U4.19@5708.55,4606.11 5656.11,4606.11 5627.5,4577.5 ; U4.100@5775.48,4184.85 5775.48,4156.85 5754,4135.37 v1(5754,4110) 5754,4086 5778,4062 C85.2@5778,3865.92 ; C88.2@5799.14,5155.22 5799.14,5229.14 5800,5230 ; U4.28@5814.85,4791.15 C88.2@5814.85,5139.52 ; v1(6110,3869) 6110,3880 6160,3930 6430,3930 v1(6450,3950) ; U4.50@6247.92,4791.15 6247.92,4842.92 6275,4870 6375,4870 6420.86,4915.86 6433.86,4915.86 6454,4936 6454,5156 6390,5220 6366,5220 ; v1(6258,4260) 6266.22,4251.78 U4.75@6314.85,4251.78 6336,4230.63 6336,4184 6355.22,4164.78 6470.86,4164.78 6474,4161.63 v1(6474,4110) ; v1(6366,5196) 6366,5220 ; C99.1@6589.78,5118.14 6607.63,5136 6624,5136 ; v1(6624,5166) 6624,5136 ; U7.8@6692,5136 6624,5136 ; U7.3@6912,5036 6943,5036 6999,5092 6999,5167 v1(6962,5204) ; v1(6937,3910) 6991.63,3910 R7.1@6991.86,3909.78 ; 7017,3873.78 7209.86,3873.78 R6.1@7212.86,3876.78 ; 7017,3874 7017,3884.63 R7.1@6991.86,3909.78 ; 7871,4110.86 C17.1@7680.22,4110.86 7603.86,4110.86 7593,4100 7593,4041 7560,4008 7431,4008 7408,3985 7343,3985 7326,3968 7019,3968 6991.86,3940.86 R7.1@6991.86,3909.78 ; v1@7873,3849 v1(7872.78,3848.78) C16.1@7872.78,3669.14 7882.04,3678.41 7950.59,3678.41 ; v1(7875,4070) 7875,4171 7880,4176 7894,4176 ; 7895,4176 7916.63,4176 7925,4167.63 U1.1@7925,4095 ; U1.27@7950.59,3807.6 7950.59,3678.41 ; C14.2@7990.22,3680.86 7987.78,3678.41 7950.59,3678.41 ; 5130,5202 5171,5202 ; 5171,5202 5202,5202 5202,4788 5214,4776 5214,4536 5232,4518 5563,4518 5574,4529 5574,4560.22 5610.22,4560.22 5627.5,4577.5 ; 5800,5230 5810,5220 6366,5220
UI_5V: P1.28 R35a.1 R43a.1 R43b.1 R45.1 | length 8516.1
  Top Layer w20: v1(2669,4023) v1@2669,4115 ; v1(4038,3999) 4038,3885 4052,3871 v1(4413,3871) 4414,3872 v1(4414,4199) ; v1(4897,5255) 4925,5283 4925,5348 4988,5411 v1(5025,5411) ; v1(5028,3738) 5028,3488 v1(5030,3486) ; v1(5785,3514) 5922,3514 5943,3535 6125,3535 6149,3511 6181,3511 6204,3534 v1(6331,3534)
  Bottom Layer w20: R43b.1@2531.78,3715.14 2531.78,3887.78 2594,3950 2652,3950 2669,3967 v1(2669,4023) ; R43a.1@2608.86,4572.78 2539.78,4572.78 2539,4572 2539,4140 2561,4118 v1(2669,4118) 2714,4118 2746,4086 3108.7,4086 3142,4052.7 3142,3949 3151,3940 4026,3940 4038,3952 v1(4038,3999) ; v1(4413,3871) 4396,3854 4396,3679 4491,3584 4491,3519 4547,3463 5007,3463 v1(5030,3486) 5031,3487 5268,3487 5295,3514 v1(5785,3514) ; v1(4414,4199) 4414,5310.23 4509.77,5406 4652,5406 4803,5255 v1@4894,5255 ; R45.1@5025.86,3797.78 5028,3795.63 v1(5028,3738) ; v1@5027,5414 5043,5430 5301,5430 5350,5479 P1.28@5350,5525 ; v1(6331,3534) 6381.08,3534 R35a.1@6388.86,3541.78
UI_8V: P1.29 R4b.1 R4d.1 | length 8040.4
  Top Layer w20: v1@4313,4310 v1(4316,4313) 4316,4392 4365,4441 v1@4365,4922.33 ; v1(4893,5312) 4893,5355 v1(5001,5463)
  Bottom Layer w20: R4d.1@3133.78,4802.14 3133.78,5039.78 3248,5154 4074,5154 4135,5215 4385,5215 ; v1(4316,4313) 4316,4063 4364,4015 4364,3661 4459,3566 4459,3508 4536,3431 4788,3431 4788,3102 6762,3102 6779,3085 7139,3085 7148,3076 7511.08,3076 R4b.1@7536.86,3101.78 ; v1(4364.61,4922.33) 4385,4942.73 4385,5215 ; v1@4891,5310 4870,5289 4810,5289 4667,5432 4499,5432 4385,5318 4385,5215 ; v1@5003,5463 5234,5463 5250,5479 P1.29@5250,5525
USB_DFU_N: J11.2 U4.70 | length 5109.1
  Top Layer w10: v1(4168,3530) 4211,3530 4231,3550 4374.28,3550 4403,3578.72 4403,3651 4426,3674 v1(4482,3674) ; v1(6177,3774) 6357,3774 6388,3805 6388,3898.77 6352,3934.77 6352,4314.28 6375.86,4338.14 6394.72,4357 6417,4357 v1(6420,4360)
  Bottom Layer w10: J11.2@2271.81,3614.17 2332.83,3614.17 2426,3521 4118.28,3521 4127.28,3530 v1(4168,3530) ; v1(4482,3674) 4553,3603 4575,3603 6032,3603 6177,3748 v1(6177,3774) ; U4.70@6314.85,4350.52 6352.16,4350.52 6400.84,4350.52 6401,4350.37 6410.63,4360 v1(6420,4360)
USB_DFU_P: J11.3 U4.71 | length 5104
  Top Layer w10: v1(4139,3570) 4168,3570 4222.72,3570 4366,3570 4383,3587 4383,3659.28 4417.72,3694 4426,3694 4442,3710 v1(4449,3710) ; v1(6138,3748) 6139.79,3749.79 6158.79,3749.79 6164.57,3744 6355.28,3744 6371.14,3759.86 6408,3796.72 6408,3907.05 6372,3943.05 6372,4306 6390,4324 6418,4324 v1(6420,4322)
  Bottom Layer w10: J11.3@2261.81,3645.67 J11.3@2271.81,3645.67 2329.61,3645.67 2346.97,3628.32 2434.28,3541 4110,3541 v1(4139,3570) ; v1(4449,3710) 4488.43,3710 4503.21,3695.21 4575.21,3623.21 ; 4575,3623 6013,3623 v1(6138,3748) ; U4.71@6314.85,4330.52 6315.01,4330.37 6400,4330.37 6408.37,4322 v1(6420,4322)
USB_HOST_N: J10.3 U4.53 | length 5446.1
  Bottom Layer w10: J10.3@2370.46,4797.47 2480,4907.01 2480,5441 2536,5497 4791,5497 4960,5328 5728.72,5328 5820.72,5236 6398.09,5236 6472,5162.09 6472,4973.37 6472,4918 6472,4809 6468,4805 6421.72,4805 6379,4762.28 6379,4691.28 6372.57,4684.85 U4.53@6314.85,4684.85
USB_HOST_P: J10.2 U4.54 | length 5462.2
  Bottom Layer w10: J10.2@2370.46,4877.47 2460,4967.01 2460,5449.28 2527.72,5517 4799.28,5517 4968.28,5348 5737,5348 5829,5256 6406.37,5256 6492,5170.37 6492,4973.37 6492,4792 6485,4785 6468,4785 6430,4785 6399,4754 6399,4683 6381.17,4665.17 U4.54@6314.85,4665.17
USBH_5V: C95a.2 J10.4 RFC4.2 | length 342
  Bottom Layer w10: J10.4@2370.46,4697.47 2463.47,4697.47 2493.22,4727.22 2548.14,4727.22 RFC4.2@2548.14,4879.22
pads on no net: J1.0 J2.0 J3.0 J11.0 J11.4 LCD1.3 LCD1.4 LCD1.5 LCD1.6 LCD1.7 LCD1.8 LCD1.9 LCD1.10 LCD1.12 LCD1.14 LCD1.18 LCD1.20 LCD1.21 LCD1.23 LCD1.24 LCD1.25 LCD1.26 LCD1.27 LCD1.28 LCD1.29 LCD1.30 LCD1.31 LCD1.37 LCD1.38 P1.7 P1.20 P1.21 P1.22 P1.26 P8.1 P8.2 P8.3 P8.4 U1.2 U1.17 U1.26 U2.1 U2.8 U3a.1 U3a.2 U3a.8 U3a.9 U5.1
copper on no net:
  other v1: 8232,3888

## Polygon pours and split planes (outlines as drawn)
GND on Top Layer "Top Layer-GND" (solid, remove dead copper, pour order 17): 9334,5608 9334,2995 1998,2995 1988,3005 1988,5608 9345,5608
GND on Bottom Layer "Bottom Layer-GND" (solid, remove dead copper, pour order 19): 9331,5614 9331,2995 1990,2995 1985,2990 1990,2995 1990,5619 9326,5619

## Keep-outs
Keep-Out Layer:
  lines w11.81: 2082,3000 9237.83,3000 ; 2088.42,3000.06 cw(c2086.71,3090.71) 1996.06,3089 1996.06,5510 cw(c2086.71,5511.71) 2085,5602.36 9234,5602.36 cw(c9235.71,5511.71) 9326.36,5513.42 ; 9237.83,2999.64 ccw(c9236.12,3090.29) 9326.77,3092 9326.77,5515

## Silkscreen, mask and mechanical layers (free items; w line width, h text height)
Top Overlay:
  lines w10: 7650,5118 7650,5430 8490,5430 8490,5118 7650,5118
  text "mcHF QRP Transceiver" at 7788,5346 h32
  text "UI board, rev 0.6.3, M0NKA" at 7664,5284 h32
  text "11 March 2019" at 7900,5219 h32
  text "www.m0nka.co.uk" at 7830,5155 h32
Bottom Overlay:
  lines w10: 7411.39,3018.49 7411.39,5466.49
  text "domain" at 7657,3987 h32 r90
  text "Analog" at 7573,3986 h32 r90
  text "Digital domain" at 6386,3099 h32

## Text inside footprints (layer, text, board x,y; h text height)
LCD1: Top Overlay "40" at 4513.76,5362.02 h32; Top Overlay "20" at 7427.76,5359.02 h32; Top Overlay "1" at 7377.76,3794.02 h32
P4: Top Overlay "swo" at 6152,3903 h32 r270; Top Overlay "nrst" at 6250,3900 h32 r270; Top Overlay "swdio" at 6350,3903 h32 r270; Top Overlay "gnd" at 6452,3902 h32 r270; Top Overlay "swclk" at 6553,3903 h32 r270; Top Overlay "detect" at 6650,3903 h32 r270